# Altium PCB SPTSquidBoardRev8.PcbDoc (part 2 of 2)
Units mil, origin at the board's own origin, x right, y up, seen from the top; angles counter-clockwise.
Board outline 6676.36 x 1770 mil, 6 copper layers (Top Layer, Internal Plane 1, Mid-Layer 1, Mid-Layer 2, Internal Plane 2, Bottom Layer), stack 48.451 mil thick; 69 components, 109 nets, 339 pads, 78 vias.
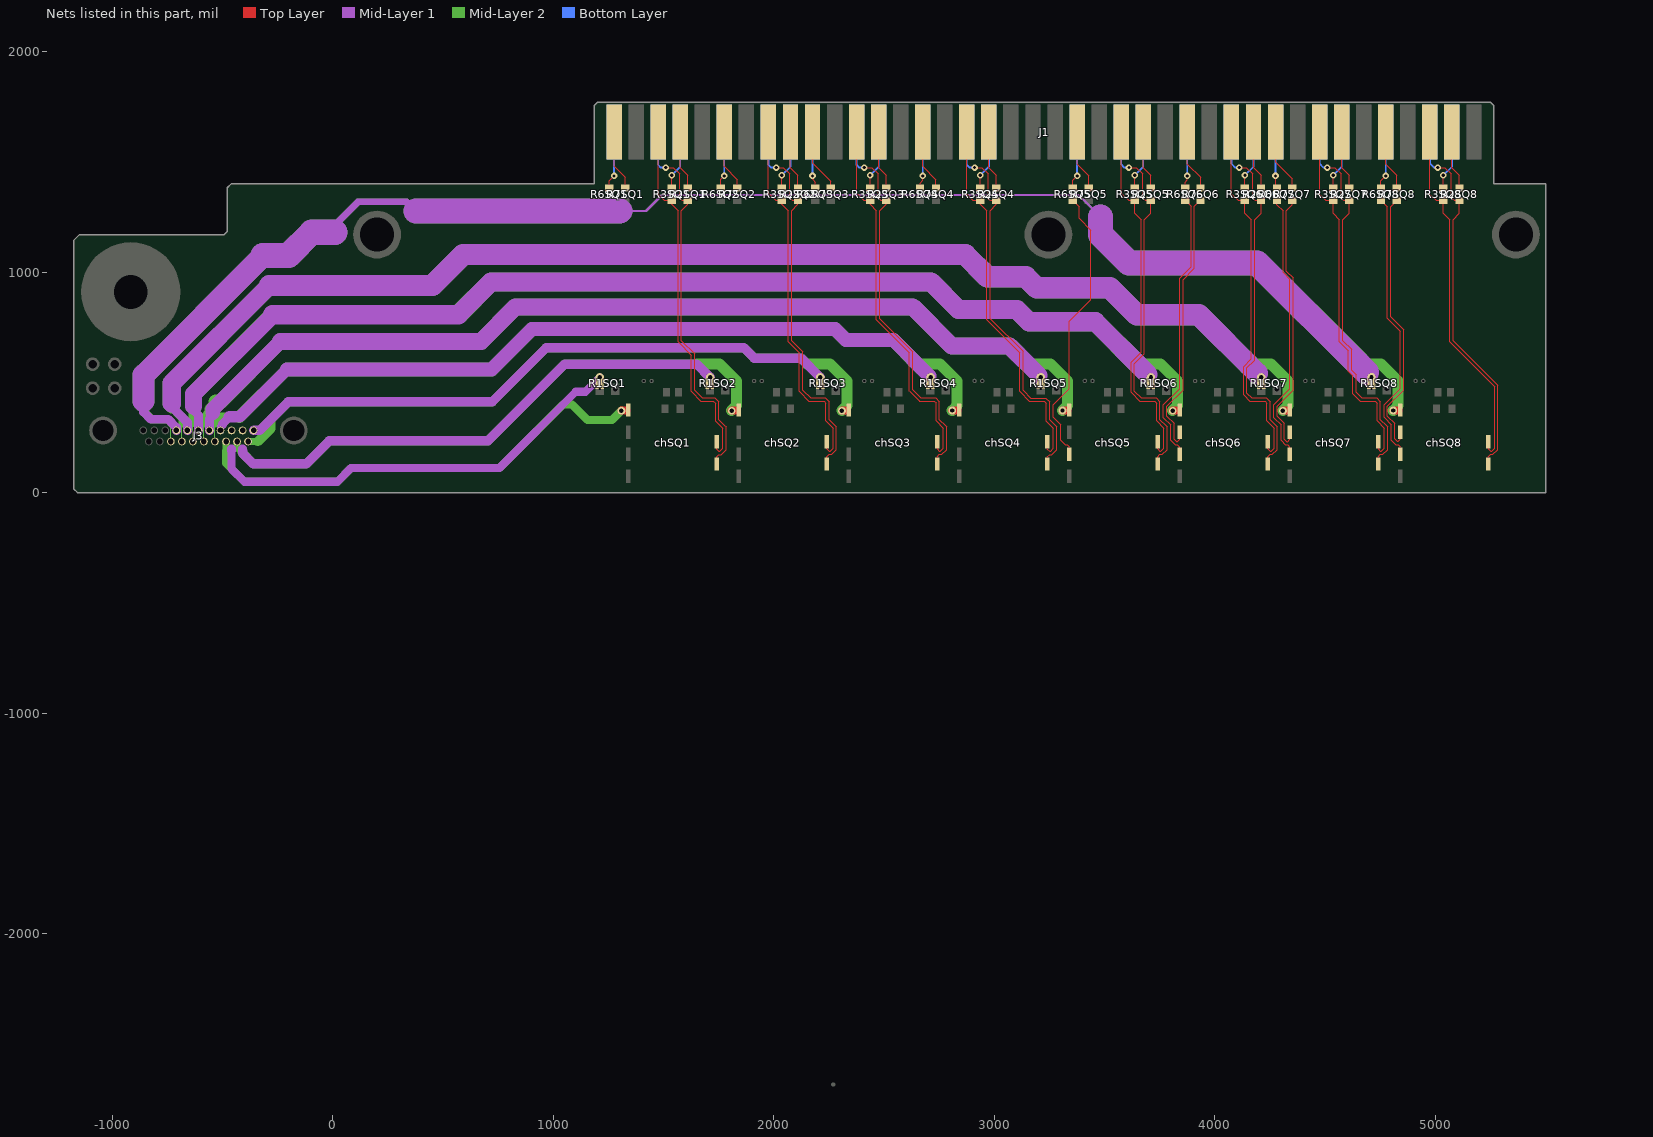
[diagram p6: the nets of this part, all layers, seen from the top]

## Via types
v1: diameter 30, hole 15, Top Layer to Bottom Layer, 62 vias
v2: diameter 35, hole 20, Top Layer to Bottom Layer, 16 vias

## Nets (pads, with @x,y where several pads share a name; then routed paths per layer and width w, separated by ;. In a path a pad name is that pad's centre, name@x,y a point inside that pad or via, vN(x,y) a via of type N, cw(c..) or ccw(c..) an arc to the next point about the centre after c; other vN are vias at no path point) (continued)
NSQSQ5_P: chSQ5.2A R6SQ5.2 | length 1291
  Top Layer w5: chSQ5.2A@3340.38,174.73 3340.38,207.23 3330.38,217.23 3320.11,217.23 3300.18,237.16 3300.18,307.86 3267.01,341.03 3267.01,398.33 3340.35,471.67 3340.35,777.56 3437,874.21 3437,1190.29 3383.71,1243.58 3383.71,1296.31 R6SQ5.2@3355.02,1325
NSQSQ6_N: chSQ6.1A R7SQ6.2 | length 1226
  Top Layer w5: chSQ6.1A@3840,274.01 3840,241.51 3830,231.51 3825.95,231.51 3814.81,242.65 3814.81,313.34 3781.63,346.52 3781.63,391.39 3855.35,465.11 3855.35,965.12 3907.28,1017.05 3907.28,1297.56 R7SQ6.2@3934.72,1325
NSQSQ6_P: chSQ6.2A R6SQ6.2 | length 1250.8
  Top Layer w5: chSQ6.2A@3840,174.01 3840,206.51 3830,216.51 3819.74,216.51 3799.81,236.44 3799.81,307.13 3766.63,340.3 3766.63,397.61 3840.35,471.32 3840.35,971.33 3892.28,1023.26 3892.28,1297.56 R6SQ6.2@3864.84,1325
NSQSQ7_N: chSQ7.1A R7SQ7.2 | length 1217.5
  Top Layer w5: chSQ7.1A@4340,274.01 4340,241.51 4330,231.51 4325.95,231.51 4314.81,242.65 4314.81,313.34 4281.63,346.52 4281.63,391.39 4355.35,465.11 4355.35,973.51 4324.02,1004.83 4324.02,1277.47 4351.55,1305 R7SQ7.2@4351.55,1325
NSQSQ7_P: chSQ7.2A R6SQ7.2 | length 1242.3
  Top Layer w5: R6SQ7.2@4281.48,1325 4281.48,1305 4309.02,1277.47 4309.02,998.62 4340.35,967.29 4340.35,471.32 4266.63,397.61 4266.63,340.3 4299.81,307.13 4299.81,236.44 4319.74,216.51 4330,216.51 4340,206.51 chSQ7.2A@4340,174.01
NSQSQ8_N: chSQ8.1A R7SQ8.2 | length 1228.7
  Top Layer w5: R7SQ8.2@4824.94,1325 4796.55,1296.61 4796.55,796.73 4855.35,737.94 4855.35,465.11 4782.01,391.77 4782.01,346.89 4815.18,313.72 4815.18,243.03 4826.33,231.88 4830.38,231.88 4840.38,241.88 chSQ8.1A@4840.38,274.38
NSQSQ8_P: chSQ8.2A R6SQ8.2 | length 1253.5
  Top Layer w5: R6SQ8.2@4753.16,1325 4781.55,1296.61 4781.55,790.52 4840.35,731.72 4840.35,471.32 4767.01,397.98 4767.01,340.68 4800.18,307.51 4800.18,236.81 4820.11,216.88 4830.38,216.88 4840.38,206.88 chSQ8.2A@4840.38,174.38
NULL_N1: J1.40B R7SQ1.1 | length 275.1
  Top Layer w5: J1.40B@1275,1635 1275,1479 1325,1429 ; R7SQ1.1@1325,1381 1325,1429 ; 1325.35,1429 1325,1429
NULL_N2: J1.35B R7SQ2.1 | length 278.6
  Top Layer w5: J1.35B@1775,1635 1775,1479 1834.45,1419.55 R7SQ2.1@1834.45,1381
NULL_N3: J1.31B R7SQ3.1 | length 288.4
  Top Layer w5: J1.31B@2175,1635 2175,1494.31 2258.09,1411.22 R7SQ3.1@2258.09,1381
NULL_N4: J1.26B R7SQ4.1 | length 278.8
  Top Layer w5: J1.26B@2675,1635 2675,1479 2734.88,1419.12 R7SQ4.1@2734.88,1381
NULL_N5: J1.19B R7SQ5.1 | length 275.7
  Top Layer w5: J1.19B@3375,1635 3375,1488.27 3427.41,1435.86 R7SQ5.1@3427.41,1381
NULL_N6: J1.14B R7SQ6.1 | length 278.7
  Top Layer w5: J1.14B@3875,1635 3875,1488.93 3934.72,1429.21 R7SQ6.1@3934.72,1381
NULL_N7: J1.10B R7SQ7.1 | length 285.7
  Top Layer w5: J1.10B@4275,1635 4275,1499.02 4351.55,1422.47 R7SQ7.1@4351.55,1381
NULL_N8: J1.5B R7SQ8.1 | length 274.7
  Top Layer w5: J1.5B@4775,1635 4775,1488.26 4824.94,1438.31 R7SQ8.1@4824.94,1381
NULL_P1: J1.40A R6SQ1.1 | length 263.4
  Top Layer w5: R6SQ1.1@1253.22,1381 1253.22,1414.22 v1(1275,1436) v1@1275.35,1436
  Bottom Layer w8: v1(1275,1436) J1.40A@1275,1635
NULL_P2: J1.35A R6SQ2.1 | length 260.7
  Top Layer w5: R6SQ2.1@1759.55,1381 1759.55,1420.55 v1(1775,1436) v1@1775.35,1436
  Bottom Layer w8: v1(1775,1436) J1.35A@1775,1635
NULL_P3: J1.31A R6SQ3.1 | length 259.5
  Top Layer w5: v1(2175,1436) 2175,1421.35 2188.2,1408.15 R6SQ3.1@2188.2,1381
  Bottom Layer w8: v1(2175,1436) J1.31A@2175,1635
NULL_P4: J1.26A R6SQ4.1 | length 259.2
  Top Layer w5: R6SQ4.1@2662.49,1381 2662.49,1403.02 2675,1415.53 v1(2675,1436)
  Bottom Layer w8: v1(2675,1436) J1.26A@2675,1635
NULL_P5: J1.19A R6SQ5.1 | length 262.3
  Top Layer w5: R6SQ5.1@3355.02,1381 3355.02,1416.02 v1(3375,1436)
  Bottom Layer w8: v1(3375,1436) J1.19A@3375,1635
NULL_P6: J1.14A R6SQ6.1 | length 258.2
  Top Layer w5: R6SQ6.1@3864.84,1381 3864.84,1407.47 3875,1417.63 v1(3875,1436)
  Bottom Layer w8: v1(3875,1436) J1.14A@3875,1635
NULL_P7: J1.10A R6SQ7.1 | length 256.7
  Top Layer w5: v1(4275,1436) 4275,1387.48 R6SQ7.1@4281.48,1381
  Bottom Layer w8: v1(4275,1436) J1.10A@4275,1635
NULL_P8: J1.5A R6SQ8.1 | length 263
  Top Layer w5: R6SQ8.1@4753.16,1381 4753.16,1414.16 v1(4775,1436)
  Bottom Layer w8: v1(4775,1436) J1.5A@4775,1635
SQ_IV_N1: J1.37A R3SQ1.1 | length 270.2
  Top Layer w5: R3SQ1.1@1536,1381 v1(1536,1439)
  Bottom Layer w8: v1(1536,1439) 1575,1478 J1.37A@1575,1635
SQ_IV_N2: J1.32A R3SQ2.1 | length 270.2
  Top Layer w5: R3SQ2.1@2036,1381 v1(2036,1439)
  Bottom Layer w8: v1(2036,1439) 2075,1478 J1.32A@2075,1635
SQ_IV_N3: J1.28A R3SQ3.1 | length 270.2
  Top Layer w5: R3SQ3.1@2436,1381 v1(2436,1439)
  Bottom Layer w8: v1(2436,1439) 2475,1478 J1.28A@2475,1635
SQ_IV_N4: J1.23A R3SQ4.1 | length 270.2
  Top Layer w5: R3SQ4.1@2936,1381 v1(2936,1439)
  Bottom Layer w8: v1(2936,1439) 2975,1478 J1.23A@2975,1635
SQ_IV_N5: J1.16A R3SQ5.1 | length 270.2
  Top Layer w5: R3SQ5.1@3636,1381 v1(3636,1439)
  Bottom Layer w8: v1(3636,1439) 3675,1478 J1.16A@3675,1635
SQ_IV_N6: J1.11A R3SQ6.1 | length 270.2
  Top Layer w5: R3SQ6.1@4136,1381 v1(4136,1439)
  Bottom Layer w8: v1(4136,1439) 4175,1478 J1.11A@4175,1635
SQ_IV_N7: J1.7A R3SQ7.1 | length 270.2
  Top Layer w5: R3SQ7.1@4536,1381 v1(4536,1439)
  Bottom Layer w8: v1(4536,1439) 4575,1478 J1.7A@4575,1635
SQ_IV_N8: J1.2A R3SQ8.1 | length 270.2
  Top Layer w5: R3SQ8.1@5036,1381 v1(5036,1439)
  Bottom Layer w8: v1(5036,1439) 5075,1478 J1.2A@5075,1635
SQ_IV_P1: J1.37B R2SQ1.2 | length 268.1
  Top Layer w5: J1.37B@1575,1635 1575,1473 1609,1439 R2SQ1.2@1609,1381
SQ_IV_P2: J1.32B R2SQ2.2 | length 268.1
  Top Layer w5: J1.32B@2075,1635 2075,1473 2109,1439 R2SQ2.2@2109,1381
SQ_IV_P3: J1.28B R2SQ3.2 | length 268.1
  Top Layer w5: J1.28B@2475,1635 2475,1473 2509,1439 R2SQ3.2@2509,1381
SQ_IV_P4: J1.23B R2SQ4.2 | length 268.1
  Top Layer w5: J1.23B@2975,1635 2975,1473 3009,1439 R2SQ4.2@3009,1381
SQ_IV_P5: J1.16B R2SQ5.2 | length 268.1
  Top Layer w5: J1.16B@3675,1635 3675,1473 3709,1439 R2SQ5.2@3709,1381
SQ_IV_P6: J1.11B R2SQ6.2 | length 268.1
  Top Layer w5: J1.11B@4175,1635 4175,1473 4209,1439 R2SQ6.2@4209,1381
SQ_IV_P7: J1.7B R2SQ7.2 | length 268.1
  Top Layer w5: J1.7B@4575,1635 4575,1473 4609,1439 R2SQ7.2@4609,1381
SQ_IV_P8: J1.2B R2SQ8.2 | length 268.1
  Top Layer w5: J1.2B@5075,1635 5075,1473 5109,1439 R2SQ8.2@5109,1381
SQ_OUT_N1: chSQ1.4 J1.38B R3SQ1.2 | length 1677.6
  Top Layer w5: J1.38B@1475,1635 1475,1353.55 1503.55,1325 R3SQ1.2@1536,1325 1536,1306.5 1565,1277.5 1565,683.21 1625,623.21 1625,458.79 1668.79,415 1725.55,415 1735.05,405.5 1735.05,324.43 1767.65,291.83 1767.65,200.61 1754.54,187.5 1750,187.5 1740,197.5 chSQ1.4@1740,230
SQ_OUT_N2: chSQ2.4 J1.33B R3SQ2.2 | length 1679.8
  Top Layer w5: J1.33B@1975,1635 1975,1358.56 2008.56,1325 R3SQ2.2@2036,1325 2036,1306.5 2065,1277.5 2065,683.21 2115,633.21 2115,458.79 2158.79,415 ; 2159.7,414.09 2227.22,414.09 2235.43,405.87 2235.43,324.81 2268.02,292.21 2268.02,200.99 2254.91,187.88 2250.38,187.88 2240.38,197.88 chSQ2.4@2240.38,220 ; chSQ2.4@2240,220 chSQ2.4@2240.38,220 ; chSQ2.4@2240.38,230.38 chSQ2.4@2240.38,220
SQ_OUT_N3: chSQ3.4 J1.29B R3SQ3.2 | length 1721.1
  Top Layer w5: J1.29B@2375,1635 2375,1357.44 2407.44,1325 R3SQ3.2@2436,1325 2436,1306.5 2465,1277.5 2465,783.21 2614.74,633.48 2614.74,459.05 ; 2615,459.13 2658.79,415.35 ; 2659.7,414.43 2727.22,414.43 2735.43,406.22 2735.43,325.15 2768.02,292.56 2768.02,201.33 2754.91,188.22 2750.38,188.22 2740.38,198.22 chSQ3.4@2740.38,230.72
SQ_OUT_N4: chSQ4.4 J1.24B R3SQ4.2 | length 1724.6
  Top Layer w5: J1.24B@2875,1635 2875,1352.55 2902.55,1325 R3SQ4.2@2936,1325 2936,1306.5 2965,1277.5 2965,783.21 3114.62,633.59 3114.62,458.41 3158.41,414.62 ; 3159.32,413.71 3226.84,413.71 3235.05,405.5 3235.05,324.43 3267.65,291.83 3267.65,200.61 3254.54,187.5 3250,187.5 3240,197.5 chSQ4.4@3240,230
SQ_OUT_N5: chSQ5.4 J1.17B R3SQ5.2 | length 1681.8
  Top Layer w5: J1.17B@3575,1635 3575,1358.27 3608.27,1325 R3SQ5.2@3636,1325 3636,1267 3665,1238 3665,636.21 3630,601.21 ; 3634.39,605.61 3619.81,591.02 3619.81,453.98 3658.79,415 ; 3659.7,414.09 3727.22,414.09 3735.43,405.87 3735.43,324.81 3768.02,292.21 3768.02,200.99 3754.91,187.88 3750.38,187.88 3740.38,197.88 chSQ5.4@3740.38,230.38
SQ_OUT_N6: chSQ6.4 J1.12B R3SQ6.2 | length 1668.7
  Top Layer w5: J1.12B@4075,1635 4075,1355.68 4105.68,1325 R3SQ6.2@4136,1325 4136,1267 4165,1238 4165,606.21 4130,571.21 4130,443.79 4158.79,415 ; 4159.7,414.09 4227.22,414.09 4235.43,405.87 4235.43,324.81 4268.02,292.21 4268.02,200.99 4254.91,187.88 4250.38,187.88 4240.38,197.88 chSQ6.4@4240.38,230.38
SQ_OUT_N7: chSQ7.4 J1.8B R3SQ7.2 | length 1683.1
  Top Layer w5: J1.8B@4475,1635 4475,1352.23 4502.23,1325 R3SQ7.2@4536,1325 4536,1267 4565,1238 4565,683.21 4605,643.21 4605,549.65 4625.62,529.03 4625.62,448.17 4658.79,415 ; 4659.7,414.09 4727.22,414.09 4735.43,405.87 4735.43,324.81 4768.02,292.21 4768.02,200.99 4754.91,187.88 4750.38,187.88 4740.38,197.88 chSQ7.4@4740.38,230.38
SQ_OUT_N8: chSQ8.4 J1.3B R3SQ8.2 | length 1644.5
  Top Layer w5: J1.3B@4975,1635 4975,1352.86 5002.86,1325 R3SQ8.2@5036,1325 5036,1267 5065,1238 5065,683.21 5268.02,480.19 5268.02,200.99 5254.91,187.88 5250.38,187.88 5240.38,197.88 chSQ8.4@5240.38,230.38
SQ_OUT_P1: chSQ1.3 J1.38A R2SQ1.1 | length 1762.6
  Top Layer w5: v1(1510,1474) 1543,1474 1572,1445 1572,1334.75 1581.75,1325 R2SQ1.1@1609,1325 1609,1306.5 1580,1277.5 1580,689.43 1640,629.43 1640,465 1675,430 1731.76,430 1750.05,411.71 1750.05,330.64 1775.58,305.11 1782.65,298.05 1782.65,194.4 1760.75,172.5 1750,172.5 1740,162.5 chSQ1.3@1740,130
  Bottom Layer w8: J1.38A@1475,1635 1475,1485.74 1486.74,1474 v1(1510,1474)
SQ_OUT_P2: chSQ2.3 J1.33A R2SQ2.1 | length 1767.2
  Top Layer w5: v1(2010,1474) 2043,1474 2072,1445 2072,1335.52 2082.52,1325 R2SQ2.1@2109,1325 2109,1306.5 2080,1277.5 2080,689.43 2130,639.43 2130,465 2165.91,429.09 2233.43,429.09 2250.43,412.09 2250.43,331.02 2275.96,305.49 2283.02,298.42 2283.02,194.77 2261.13,172.88 2250.38,172.88 2240.38,162.88 chSQ2.3@2240.38,130.38
  Bottom Layer w8: J1.33A@1975,1635 1975,1487.48 1988.48,1474 v1(2010,1474)
SQ_OUT_P3: chSQ3.3 J1.29A R2SQ3.1 | length 1808.3
  Top Layer w5: v1(2410,1474) 2443,1474 2472,1445 2472,1337.11 2484.11,1325 R2SQ3.1@2509,1325 2509,1306.5 2480,1277.5 2480,789.43 2629.74,639.69 2629.74,465.26 ; 2630,465.35 2665.91,429.43 2733.43,429.43 2750.43,412.43 2750.43,331.37 2775.96,305.84 2783.02,298.77 2783.02,195.12 2761.13,173.22 2750.38,173.22 2740.38,163.22 chSQ3.3@2740.38,130.72
  Bottom Layer w8: J1.29A@2375,1635 2375,1485.86 2386.86,1474 v1(2410,1474)
SQ_OUT_P4: chSQ4.3 J1.24A R2SQ4.1 | length 1811
  Top Layer w5: v1(2910,1474) 2943,1474 2972,1445 2972,1332.1 2979.1,1325 R2SQ4.1@3009,1325 3009,1306.5 2980,1277.5 2980,789.43 3129.62,639.8 3129.62,464.62 3165.54,428.71 3233.05,428.71 3250.05,411.71 3250.05,330.64 3275.58,305.11 3282.65,298.05 3282.65,194.4 3260.75,172.5 3250,172.5 3240,162.5 chSQ4.3@3240,130
  Bottom Layer w8: J1.24A@2875,1635 2875,1487.21 2888.21,1474 v1(2910,1474)
SQ_OUT_P5: chSQ5.3 J1.17A R2SQ5.1 | length 1762.4
  Top Layer w5: v1(3610,1474) 3643,1474 3672,1445 3672,1335.93 3682.93,1325 R2SQ5.1@3709,1325 3709,1267 3680,1238 3680,630 3634.81,584.81 3634.81,460.19 3665.91,429.09 3733.43,429.09 3750.43,412.09 3750.43,331.02 3775.96,305.49 3783.02,298.42 3783.02,194.77 3761.13,172.88 3750.38,172.88 3740.38,162.88 chSQ5.3@3740.38,130.38
  Bottom Layer w8: J1.17A@3575,1635 3575,1488.43 3589.43,1474 v1(3610,1474)
SQ_OUT_P6: chSQ6.3 J1.12A R2SQ6.1 | length 1752.6
  Top Layer w5: v1(4110,1474) 4143,1474 4172,1445 4172,1334.71 4181.71,1325 R2SQ6.1@4209,1325 4209,1267 4180,1238 4180,600 4145,565 4145,450 4165.91,429.09 4233.43,429.09 4250.43,412.09 4250.43,331.02 4275.96,305.49 4283.02,298.42 4283.02,194.77 4261.13,172.88 4250.38,172.88 4240.38,162.88 chSQ6.3@4240.38,130.38
  Bottom Layer w8: J1.12A@4075,1635 4075,1492.01 4093.01,1474 v1(4110,1474)
SQ_OUT_P7: chSQ7.3 J1.8A R2SQ7.1 | length 1765.8
  Top Layer w5: v1(4510,1474) 4543,1474 4572,1445 4572,1334.24 4581.24,1325 R2SQ7.1@4609,1325 4609,1267 4580,1238 4580,689.43 4620,649.43 4620,555.86 4640.62,535.24 4640.62,454.38 4665.91,429.09 4733.43,429.09 4750.43,412.09 4750.43,331.02 4775.96,305.49 4783.02,298.42 4783.02,194.77 4761.13,172.88 4750.38,172.88 4740.38,162.88 chSQ7.3@4740.38,130.38
  Bottom Layer w8: J1.8A@4475,1635 4475,1491.22 4492.22,1474 v1(4510,1474)
SQ_OUT_P8: chSQ8.3 J1.3A R2SQ8.1 | length 1722.3
  Top Layer w5: v1(5010,1474) 5043,1474 5072,1445 5072,1337.71 5084.71,1325 R2SQ8.1@5109,1325 5109,1267 5080,1238 5080,689.43 5283.02,486.4 5283.02,194.77 5261.13,172.88 5250.38,172.88 5240.38,162.88 chSQ8.3@5240.38,130.38
  Bottom Layer w8: J1.3A@4975,1635 4975,1494.37 4995.37,1474 v1(5010,1474)
WIRE_N1: J3.9 R1SQ1.2B | length 1979.5
  Mid-Layer 1 w37: -460.06,190.25 -460.06,107.65 -401.48,49.06 19.8,49.06 82.29,111.56 755.39,111.56 1101.05,457.21 1144.94,457.21 R1SQ1.2B@1209.92,522.19
  Mid-Layer 1 w40: -460.06,190.25 -460.06,196.9
WIRE_N2: J3.10 R1SQ2.2B | length 2371
  Mid-Layer 1 w40: -410.06,190.25 -410.06,196.9
  Mid-Layer 1 w43: -410.06,190.25 -410.06,178.53 -362.07,130.54 -120.19,130.54 -15.82,234.9 703.2,234.9 1051.18,582.88 1649.99,582.88 R1SQ2.2B@1710.3,522.57
WIRE_N3: J3.11 R1SQ3.2B | length 2781.4
  Mid-Layer 1 w43: J3.11@-360.06,281.58 -332.1,281.58 -201.89,411.79 722.37,411.79 967.68,657.09 1863.58,657.09 1911.01,609.66 2122.46,609.66 R1SQ3.2B@2209.92,522.19
WIRE_N4: J3.8 R1SQ4.2B | length 3505.8
  Mid-Layer 1 w30: J3.8@-510.06,281.58 -510.06,300.05 -500.99,309.12
  Mid-Layer 1 w40: -500.99,309.12 -500.99,311.94 -469.18,343.75
  Mid-Layer 1 w54: -469.18,343.75 -423.13,343.75 -209.15,557.72
  Mid-Layer 1 w64: -209.15,557.72 718.88,557.72 902.41,741.25 2276.67,741.25 2326.45,691.47 2541.4,691.47 R1SQ4.2B@2704.61,528.26
WIRE_N5: J3.7 R1SQ5.2B | length 4170
  Mid-Layer 1 w40: J3.7@-560.06,281.58 -560.06,333.43 -544.94,348.54 -544.94,361.66
  Mid-Layer 1 w67: -544.94,361.66 -544.94,377.91 -237.22,685.63
  Mid-Layer 1 w77: -237.22,685.63 671.79,685.63 828.58,842.43 2629.46,842.43 2808.05,663.84 3069.37,663.84 R1SQ5.2B@3201.39,531.83
WIRE_N6: J3.6 R1SQ6.2B | length 4887.4
  Mid-Layer 1 w40: -632.26,392.56 -632.26,371.99 -610.06,349.79 J3.6@-610.06,281.58
  Mid-Layer 1 w76: -632.26,392.56 -632.26,446.57 -272.69,806.14
  Mid-Layer 1 w87: -272.69,806.14 568.83,806.14 718.29,955.6 2711.99,955.6 2838.04,829.55 3102.15,829.55 3157.13,774.57 3457.54,774.57 3696.24,535.87
WIRE_N7: J3.5 R1SQ7.2B | length 5630.2
  Mid-Layer 1 w40: -730.76,404.58 -730.76,389.32 -660.06,318.62 J3.5@-660.06,281.58
  Mid-Layer 1 w84: -730.76,404.58 -730.76,496.29 -287.71,939.35
  Mid-Layer 1 w97: -287.71,939.35 450.3,939.35 590.72,1079.77 2866.93,1079.77 2967.91,978.8 3141.35,978.8 3191.25,928.9 3522.52,928.9 3645.51,805.9 3926.21,805.9 4191.43,541.99
WIRE_N8: J3.4 R1SQ8.2B | length 6677
  Mid-Layer 1 w10: 1300.71,1277.01 1419.68,1277.01 1492.43,1349.77 3382.19,1349.77 3481.87,1250.09
  Mid-Layer 1 w30: 9.24,1180.73 9.24,1214.08 113.35,1318.19 334.95,1318.19 376.13,1277.01
  Mid-Layer 1 w40: -858.86,415.22 -858.86,365.2 -826.19,332.53 -747.24,332.53 -710.06,295.34 J3.4@-710.06,281.58
  Mid-Layer 1 w99: -858.86,415.22 -858.86,532.74 -317.19,1074.4
  Mid-Layer 1 w114: -317.19,1074.4 -202.37,1074.4 -96.04,1180.73 9.24,1180.73 ; 376.13,1277.01 1300.71,1277.01 ; 3481.87,1250.09 3481.87,1169.79 3610.44,1041.22 4191.65,1041.22 4687.04,545.83
WIRE_P1: chSQ1.1B J3.19 | length 2141.8
  Top Layer w37: v2(1308.37,371.62) chSQ1.1B@1331.15,371.62
  Mid-Layer 2 w30: -485.06,188.36 J3.19@-485.06,231.58
  Mid-Layer 2 w37: -485.06,188.36 -485.06,132.96 -401.16,49.06 19.8,49.06 82.29,111.56 755.39,111.56 1043.83,399.99 1084.05,399.99 1154.77,329.28 1266.03,329.28 v2(1308.37,371.62)
WIRE_P2: chSQ2.1B J3.20 | length 2709.6
  Top Layer w37: v2(1808.37,371.62) chSQ2.1B@1831.15,371.62
  Mid-Layer 2 w30: J3.20@-435.06,231.58 -435.06,203.83 -410.85,179.61
  Mid-Layer 2 w43: -410.85,179.61 -361.77,130.54 -120.19,130.54 -15.82,234.9 703.2,234.9 1051.18,582.88 1649.99,582.88
  Mid-Layer 2 w50: 1649.99,582.88 1753.82,582.88 1830.85,505.85 1830.85,394.1 v2(1808.37,371.62)
WIRE_P3: chSQ3.1B J3.21 | length 3145.4
  Top Layer w37: v2(2308.37,371.62) chSQ3.1B@2331.15,371.62
  Mid-Layer 2 w30: J3.21@-385.06,231.58 -340.01,231.58
  Mid-Layer 2 w43: -340.01,231.58 -282.95,288.64 -282.95,330.54 -201.7,411.79 722.37,411.79 967.68,657.09 1863.58,657.09 1911.01,609.66 2122.46,609.66 2149.61,582.5
  Mid-Layer 2 w50: 2149.99,582.88 2253.82,582.88 2330.85,505.85 2330.85,394.1 v2(2308.37,371.62)
WIRE_P4: chSQ4.1B J3.18 | length 3914.4
  Top Layer w37: v2(2808.74,372) chSQ4.1B@2831.53,372
  Mid-Layer 2 w5: J3.18@-535.06,231.58 -535.06,309.96
  Mid-Layer 2 w30: -535.06,309.96 -535.06,322.65 -514.9,342.81
  Mid-Layer 2 w40: -514.9,342.81 -424.07,342.81
  Mid-Layer 2 w50: 2649.99,582.88 2753.82,582.88 2830.85,505.85 2830.85,394.1 v2(2808.74,372)
  Mid-Layer 2 w54: -424.07,342.81 -209.15,557.72
  Mid-Layer 2 w64: -209.15,557.72 718.88,557.72 902.41,741.25 2276.67,741.25 2326.45,691.47 2541.4,691.47 2649.99,582.88 2664.65,568.22
WIRE_P5: chSQ5.1B J3.17 | length 4561.8
  Top Layer w37: v2(3308.74,372.34) chSQ5.1B@3331.53,372.34
  Mid-Layer 2 w5: J3.17@-585.06,231.58 -585.06,309.96
  Mid-Layer 2 w30: -585.06,309.96 -585.06,340.4
  Mid-Layer 2 w40: -585.06,340.4 -562.85,362.61 -562.85,379.68 -532.05,410.48
  Mid-Layer 2 w50: 3149.99,582.88 3150.33,582.88 3253.82,582.88 3330.85,505.85 3330.85,394.45 v2(3308.74,372.34)
  Mid-Layer 2 w67: -532.05,410.48 -512.38,410.48 -237.23,685.63
  Mid-Layer 2 w77: -237.23,685.63 671.79,685.63 828.58,842.43 2629.46,842.43 2808.05,663.84 3069.37,663.84 3150.33,582.88 3160.19,573.02
WIRE_P6: chSQ6.1B J3.16 | length 5247.7
  Top Layer w37: v2(3808.37,371.62) chSQ6.1B@3831.15,371.62
  Mid-Layer 2 w5: J3.16@-635.06,231.58 -635.06,309.96
  Mid-Layer 2 w40: -635.06,316.26 -635.06,390.56 -632.64,392.97
  Mid-Layer 2 w50: 3649.99,582.88 3753.82,582.88 3830.85,505.85 3830.85,394.1 v2(3808.37,371.62)
  Mid-Layer 2 w76: -632.64,392.97 -632.64,446.19 -271.67,807.16
  Mid-Layer 2 w87: -271.67,807.16 569.85,807.16 718.29,955.6 2711.99,955.6 2838.04,829.55 3102.15,829.55 3157.13,774.57 3457.54,774.57 3657.74,574.37
WIRE_P7: chSQ7.1B J3.15 | length 6006.9
  Top Layer w37: v2(4308.37,371.62) chSQ7.1B@4331.15,371.62
  Mid-Layer 2 w5: J3.15@-685.06,231.58 -685.06,309.96
  Mid-Layer 2 w30: -685.06,309.96 -685.06,342.37
  Mid-Layer 2 w40: -731.92,379.51 -731.92,389.24 ; -731.92,405.27 -731.92,389.24 ; -685.06,342.37 -731.92,389.24
  Mid-Layer 2 w50: 4149.99,582.88 4150.34,582.88 4253.82,582.88 4330.85,505.85 4330.85,394.1 v2(4308.37,371.62)
  Mid-Layer 2 w84: -731.92,405.27 -731.92,495.13 -287.71,939.35
  Mid-Layer 2 w97: -287.71,939.35 450.3,939.35 590.72,1079.77 2866.93,1079.77 2967.91,978.8 3141.35,978.8 3191.25,928.9 3522.52,928.9 3645.51,805.9 3926.21,805.9 4150.34,582.88 4154.06,579.18
WIRE_P8: chSQ8.1B J3.14 | length 7033.8
  Top Layer w37: v2(4808.74,372) chSQ8.1B@4831.53,372
  Mid-Layer 2 w5: J3.14@-735.06,231.58 -735.06,309.96
  Mid-Layer 2 w10: 1300.71,1277.01 1419.68,1277.01 1492.43,1349.77 3382.19,1349.77 3481.87,1250.09
  Mid-Layer 2 w30: -751.18,332.38 -735.06,316.26 -735.06,309.96 ; 9.24,1180.73 9.24,1214.08 113.35,1318.19 334.95,1318.19 376.13,1277.01
  Mid-Layer 2 w40: -858.62,415.67 -858.62,366.53 -824.47,332.38 -751.18,332.38
  Mid-Layer 2 w50: 4649.99,582.88 4753.82,582.88 4830.85,505.85 4830.85,394.1 v2(4808.74,372)
  Mid-Layer 2 w99: -858.62,415.67 -858.62,532.97 -317.19,1074.4
  Mid-Layer 2 w114: -317.19,1074.4 -202.37,1074.4 -96.04,1180.73 9.24,1180.73 ; 376.13,1277.01 1300.71,1277.01 ; 3481.87,1250.09 3481.87,1169.79 3610.44,1041.22 4191.65,1041.22 4646.05,586.82
pads on no net: J1.1A J1.20A J1.20B J1.21A J1.21B J1.22A J3.1 J3.2 J3.3 J3.12 J3.13 S1.4

## Polygon pours and split planes (outlines as drawn)
WIRE_P8 on Mid-Layer 2 "Top Layer-No Net" (solid, remove dead copper, pour order 25): 1276.89,1219.92 1393.06,1219.92 1437.54,1219.92 1453.74,1236.11 3081.11,1236.11 3271.04,1236.11 3370.5,1136.65 3418.81,1088.34 3531.05,1088.34 3531.05,1276.6 3468.54,1339.11 3413,1394.65 3399.63,1394.65 1345.69,1394.65 1278.38,1332.72
WIRE_P4 on Mid-Layer 2 "Top Layer-No Net" (solid, pour order 16): -547.19,304.52 -547.03,304.37 -547.03,249.94 -547.03,243.56 -535.06,231.58 -522.48,244.15 -522.48,291.72 -522.48,304.52
WIRE_P5 on Mid-Layer 2 "Top Layer-No Net" (solid, pour order 18): -597.19,304.52 -597.03,304.37 -597.03,249.94 -597.03,243.56 -585.06,231.58 -572.48,244.15 -572.48,291.72 -572.48,304.52
WIRE_P6 on Mid-Layer 2 "Top Layer-No Net" (solid, pour order 22): -647.19,304.52 -647.03,304.37 -647.03,249.94 -647.03,243.56 -635.06,231.58 -622.48,244.15 -622.48,291.72 -622.48,304.52
WIRE_P8 on Mid-Layer 2 "Top Layer-No Net" (solid, remove dead copper, pour order 13): 196.35,1018.9 284.77,1018.9 ccw(c231.8,1213.28) 387.96,1085.99 447.81,1220.8 447.81,1333.45 312.66,1333.45 109.74,1333.45 45.37,1333.45 ccw(c45.37,1302.38) 23.4,1324.35 -62.57,1238.38 -62.57,1123.51 -47.91,1106.38 -36.84,1095.32 ccw(c147.65,1279.82) 147.65,1018.9
WIRE_P8 on Mid-Layer 2 "Top Layer-No Net" (solid, pour order 21): -747.19,304.52 -747.03,304.37 -747.03,249.94 -747.03,243.56 -735.06,231.58 -722.48,244.15 -722.48,291.72 -722.48,304.52
WIRE_P7 on Mid-Layer 2 "Top Layer-No Net" (solid, pour order 17): -697.19,304.52 -697.03,304.37 -697.03,249.94 -697.03,243.56 -685.06,231.58 -672.48,244.15 -672.48,291.72 -672.48,304.52
WIRE_N8 on Mid-Layer 1 "Top Layer-No Net" (solid, remove dead copper, pour order 19): 1276.89,1219.92 1393.06,1219.92 1437.54,1219.92 1453.74,1236.11 3081.11,1236.11 3271.04,1236.11 3370.5,1136.65 3418.81,1088.34 3531.05,1088.34 3531.05,1276.6 3468.54,1339.11 3413,1394.65 3399.63,1394.65 1345.69,1394.65 1278.38,1332.72
WIRE_N8 on Mid-Layer 1 "Top Layer-No Net" (solid, remove dead copper, pour order 12): 196.35,1018.9 284.77,1018.9 ccw(c231.8,1213.28) 387.96,1085.99 447.81,1220.8 447.81,1333.45 312.66,1333.45 109.74,1333.45 45.37,1333.45 ccw(c45.37,1302.38) 23.4,1324.35 -62.57,1238.38 -62.57,1123.51 -47.91,1106.38 -36.84,1095.32 ccw(c147.65,1279.82) 147.65,1018.9
WIRE_N1 on Mid-Layer 1 "Top Layer-No Net" (solid, pour order 15): -447.93,208.64 -448.08,208.79 -448.08,263.22 -448.08,269.6 -460.06,281.58 -472.63,269.01 -472.63,221.44 -472.63,208.64
WIRE_N2 on Mid-Layer 1 "Top Layer-No Net" (solid, pour order 14): -397.93,208.64 -398.08,208.79 -398.08,263.22 -398.08,269.6 -410.06,281.58 -422.63,269.01 -422.63,221.44 -422.63,208.64
no net on Top Solder "Top Layer-No Net" (solid): 1185,1505 1185,1755 1200,1770 5250,1770 5265,1755 5265,1505
no net on Bottom Solder "Top Layer-No Net" (solid): 1185,1505 1185,1755 1200,1770 5250,1770 5265,1755 5265,1505
no net on Mechanical 3 "Top Layer-No Net" (solid): 1185,1505 1185,1755 1200,1770 5250,1770 5265,1755 5265,1505
GND_POWER on Internal Plane 1 (split plane): 5244.9,1746.68 5244.9,1400 5245.29,1396.08 5246.43,1392.31 5248.29,1388.84 5250.79,1385.79 5253.84,1383.29 5257.31,1381.43 5261.08,1380.29 5265,1379.9 5479.9,1379.9 5479.9,20.1 -1150.31,20.1 -1156.26,26.04 -1156.26,1135.07 -1141.43,1149.9 -493.27,1149.9 -489.35,1150.29 -485.58,1151.43 -482.1,1153.29 -479.06,1155.79 -465.18,1169.66 -462.68,1172.71 -460.83,1176.18 -459.68,1179.95 -459.3,1183.87 -459.3,1374.38 -454.08,1379.6 879.69,1379.6 882.8,1379.9 1185,1379.9 1188.92,1380.29 1192.69,1381.43 1196.16,1383.29 1199.21,1385.79 1201.71,1388.84 1203.57,1392.31 1204.71,1396.08 1205.1,1400 1205.1,1746.68 1208.32,1749.9 5241.68,1749.9
GND_POWER on Internal Plane 2 (split plane): 5244.9,1746.68 5244.9,1400 5245.29,1396.08 5246.43,1392.31 5248.29,1388.84 5250.79,1385.79 5253.84,1383.29 5257.31,1381.43 5261.08,1380.29 5265,1379.9 5479.9,1379.9 5479.9,20.1 -1150.31,20.1 -1156.26,26.04 -1156.26,1135.07 -1141.43,1149.9 -493.27,1149.9 -489.35,1150.29 -485.58,1151.43 -482.1,1153.29 -479.06,1155.79 -465.18,1169.66 -462.68,1172.71 -460.83,1176.18 -459.68,1179.95 -459.3,1183.87 -459.3,1374.38 -454.08,1379.6 879.69,1379.6 882.8,1379.9 1185,1379.9 1188.92,1380.29 1192.69,1381.43 1196.16,1383.29 1199.21,1385.79 1201.71,1388.84 1203.57,1392.31 1204.71,1396.08 1205.1,1400 1205.1,1746.68 1208.32,1749.9 5241.68,1749.9

## Keep-outs
Keep-Out Layer:
  circle w1: c200,1170 r124
  circle w1: c3245,1170 r124
  lines w10: -1176.36,17.72 -1176.36,1143.39 -1149.75,1170 -740.72,1170 -493.27,1170 -479.39,1183.87 -479.39,1382.7 -462.4,1399.69 879.69,1399.69 880,1400 1185,1400 1185,1755 1200,1770 5250,1770 5265,1755 5265,1400 5500,1400 5500,0 -1158.64,0 -1176.36,17.72

## Other copper
Top Layer:
  text "Top" at 2515,3094 h60
  text "Top" at 4756.5,-188.52 h60
Mid-Layer 1:
  text "Mid1 (Signal layer)" at 2522,2695 h60
  text "Mid1 (Signal layer)" at 4779.52,-370.74 h60
Mid-Layer 2:
  text "Mid2 (Signal Layer)" at 2513,2494 h56.25
  text "Mid2 (Signal Layer)" at 4775.69,-453.22 h56.25
Bottom Layer:
  text "BOT" at 2514,2087 h56.25
  text "BOT" at 4779.52,-623.93 h56.25
Internal Plane 1 (plane layer: these items are gaps in the copper):
  text "GND (Plane)" at 2524,2897.6 h56.25
  text "GND (Plane)" at 4769.93,-278.67 h56.25
Internal Plane 2 (plane layer: these items are gaps in the copper):
  text "GND (Plane)" at 2514,2294.4 h56.25
  text "GND (Plane)" at 4777.6,-541.45 h56.25

## Silkscreen, mask and mechanical layers (free items; w line width, h text height)
Top Overlay:
  text "Pin22B" at 3029.19,1474.51 h20
  text "Pin1B" at 5141,1475 h20
  text "SQ1" at 1375,1230 h56.25
  text "SQ2" at 1855,1230 h56.25
  text "SQ3" at 2260,1230 h56.25
  text "SQ4" at 2760,1230 h56.25
  text "SQ5" at 3440,1230 h56.25
  text "SQ6" at 3940,1230 h56.25
  text "SQ7" at 4340,1230 h56.25
  text "SQ8" at 4840,1230 h56.25
  text "HEAT" at 1686,1171 h30 r90
  text "HEAT" at 2586,1171 h30 r90
  text "HEAT" at 3086,1171 h30 r90
  text "HEAT" at 3786,1171 h30 r90
  text "HEAT" at 4686,1171 h30 r90
  text "SIDE B" at -589.65,806.47 h60
  text "Therm" at -1135.66,643.72 h40
  text "SQUID Mounting PCB v8" at -910.71,608.29 h40
  text "adamjohngilbert@gmail.com" at -911.71,548.29 h40
  text "Amy Bender" at -911.71,479.29 h40
  text "Martin Lueker" at -911.71,414.29 h40
  text "MicroD This Side" at -908.3,63.44 h40
Bottom Overlay:
  text "Pin22A" at 3135.17,1476.49 h20
  text "Pin1A" at 5225.96,1476.16 h20
  text "SIDE A" at -412.58,806.47 h60
Mechanical 1:
  lines w5: 1185,1505 5265,1505
  lines w6.01: 1185,1505 1185,1755 ; 5265,1505 5265,1755
  lines w10: -1582.81,1170 -730,1170 ; -1149.74,1170 -1176.04,1143.7 -1176.04,17.56 -1158.48,0 -975,0 -935,0 5500,0 5500,1400 5265,1400 5265,1755 5250,1770 1200,1770 1185,1755 1185,1400 -462.4,1400 ; -730,-358.23 -730,1170 ; -730,1640.97 -730,1170 ; -480,-358.23 -480,1170 ; -480,1549.87 -480,1170 ; 1185,1475 5265,1475 ; -730,1170 -730,1398.84 ; -730,1170 -480,1170 ; -730,1170 -730,1398.84 ; -730,1398.84 -731.16,1400 -730,1398.84
  text "Aug 24th, 2017" at 2912,3346 h56.25
  text "SQUID Mounting Board v8" at 1191,3340 h56.25
  text "Board Dimensions: 1.78\" x 7.11\"" at 1187,3263 h56.25
  text "Board Thickness: 0.059\" (including all layers + SolderMask)" at 1187,3184 h56.25
  text "Routing Layer Stackup:" at 1187,3097 h56.25
  text "Top" at 2521,3097 h56.25
  text "4mil" at 2694,3004 h56.25
  text "GND" at 2523,2900 h56.25
  text "20 - 22 mil" at 2678,2798 h56.25
  text "Mid1" at 2528,2696 h56.25
  text "2 - 3mil" at 2681,2597 h56.25
  text "Mid2" at 2511,2496 h56.25
  text "20 - 22 mil" at 2688,2399 h56.25
  text "GND" at 2512,2296 h56.25
  text "4mil" at 2685,2190 h56.25
  text "BOT" at 2512,2088 h56.25
  text "Edge Of Shield" at -465.71,2033.83 h60 r90
  text "Fingered Tips (80 PLCS): Plated with Hard gold" at 1247.5,2004.98 h56.25
  text "See Mechanical 3 for Hard gold plating region (both sides of board)" at 1253.86,1904.88 h56.25
  text "Tips bevelled as per best suggestion." at 1250,1822 h56.25
  text "Ref5F Board edge" at -710.83,1668.63 h60 r90
  text "Needed to work in" at -1748.76,1312.4 h60
  text "McGill Cryostat" at -1581.59,1222.38 h60
  text "Press-in Nut" at 4768,982 h60
  text "Press-in Nut" at -139,969 h60
  text "Press-in Nut" at 2930,960 h60
  text "450mil ThermDiam" at -1668.39,209.73 h60 r90
  text "Note: No Nickel (or any other Ferromagnetic) is to be used in fabrication." at 627,-187 h56.25
  text "The following metals are approved for processing this board:" at 636,-293 h56.25
  text "Copper, Solder, Hard Gold (tips only)." at 637,-390 h56.25
  text "0.020\"x0.060\" Bare Copper Bond pads (48 PLCS), to be protected" at 643,-567 h56.25
  text "with peelable mask (see Mech 2 layer) during HASL process" at 637,-662 h56.25
Mechanical 2:
  rectangle: 5228.28,94.07 5251.62,163.1
  rectangle: 5228.28,194.07 5251.62,263.1
  rectangle: 4828.28,38.08 4851.62,107.11
  rectangle: 4828.28,138.08 4851.62,207.11
  rectangle: 4828.66,238.45 4851.99,307.48
  rectangle: 4828.28,338.08 4851.62,407.11
  rectangle: 4728.28,94.07 4751.62,163.1
  rectangle: 4728.28,194.07 4751.62,263.1
  rectangle: 4328.28,38.08 4351.62,107.11
  rectangle: 4328.28,138.08 4351.62,207.11
  rectangle: 4328.28,238.08 4351.62,307.11
  rectangle: 4328.28,338.08 4351.62,407.11
  rectangle: 4228.28,94.07 4251.62,163.1
  rectangle: 4228.66,194.45 4251.99,263.48
  rectangle: 3828.28,38.08 3851.62,107.11
  rectangle: 3828.28,338.08 3851.62,407.11
  rectangle: 3828.28,138.08 3851.62,207.11
  rectangle: 3828.28,238.08 3851.62,307.11
  rectangle: 3728.66,194.45 3751.99,263.48
  rectangle: 3728.66,94.45 3751.99,163.48
  rectangle: 3328.28,38.08 3351.62,107.11
  rectangle: 3328.28,138.08 3351.62,207.11
  rectangle: 3328.28,238.08 3351.62,307.11
  rectangle: 3328.28,338.08 3351.62,407.11
  rectangle: 3228.28,94.07 3251.62,163.1
  rectangle: 3228.28,194.07 3251.62,263.1
  rectangle: 2828.28,38.08 2851.62,107.11
  rectangle: 2828.28,138.08 2851.62,207.11
  rectangle: 2828.28,238.08 2851.62,307.11
  rectangle: 2828.28,338.08 2851.62,407.11
  rectangle: 2728.28,94.07 2751.62,163.1
  rectangle: 2728.66,194.8 2751.99,263.82
  rectangle: 2328.28,338.08 2351.62,407.11
  rectangle: 2328.28,38.08 2351.62,107.11
  rectangle: 2328.28,138.08 2351.62,207.11
  rectangle: 2328.28,238.08 2351.62,307.11
  rectangle: 2228.66,194.45 2251.99,263.48
  rectangle: 2228.66,94.45 2251.99,163.48
  rectangle: 1828.28,38.08 1851.62,107.11
  rectangle: 1828.28,138.08 1851.62,207.11
  rectangle: 1828.28,238.08 1851.62,307.11
  rectangle: 1828.28,338.08 1851.62,407.11
  rectangle: 1728.28,94.07 1751.62,163.1
  rectangle: 1728.28,194.07 1751.62,263.1
  rectangle: 1328.28,38.08 1351.62,107.11
  rectangle: 1328.28,138.08 1351.62,207.11
  rectangle: 1328.28,238.08 1351.62,307.11
  rectangle: 1328.28,338.08 1351.62,407.11
  text "No tinning at these locations - can use peelable mask" at 1544,-117 h60
Mechanical 3:
  text "Plate this region on both sides of the board with Gold" at 1569.98,1389 h60

## Dimensions
20,-90 to -72.56,1.58 on Mechanical 1
-1176.04,1143.7 to -480,1170 on Mechanical 1
-1176.04,17.56 to 5500,0 on Mechanical 1
5500,0 to -730,-358.23 on Mechanical 1
-935,0 to 1310.87,506.78 on Mechanical 1
-730,1170 to -731.16,1400 on Mechanical 1
-730,1170 to -1176.04,1143.7 on Mechanical 1

## Text inside footprints (layer, text, board x,y; h text height)
J1: Mechanical 1 "40 POS/80 CONNECTION, EDGE BOARD" at 480,1630 h22.5